# EAGLE board basis (EAGLE 6.4)
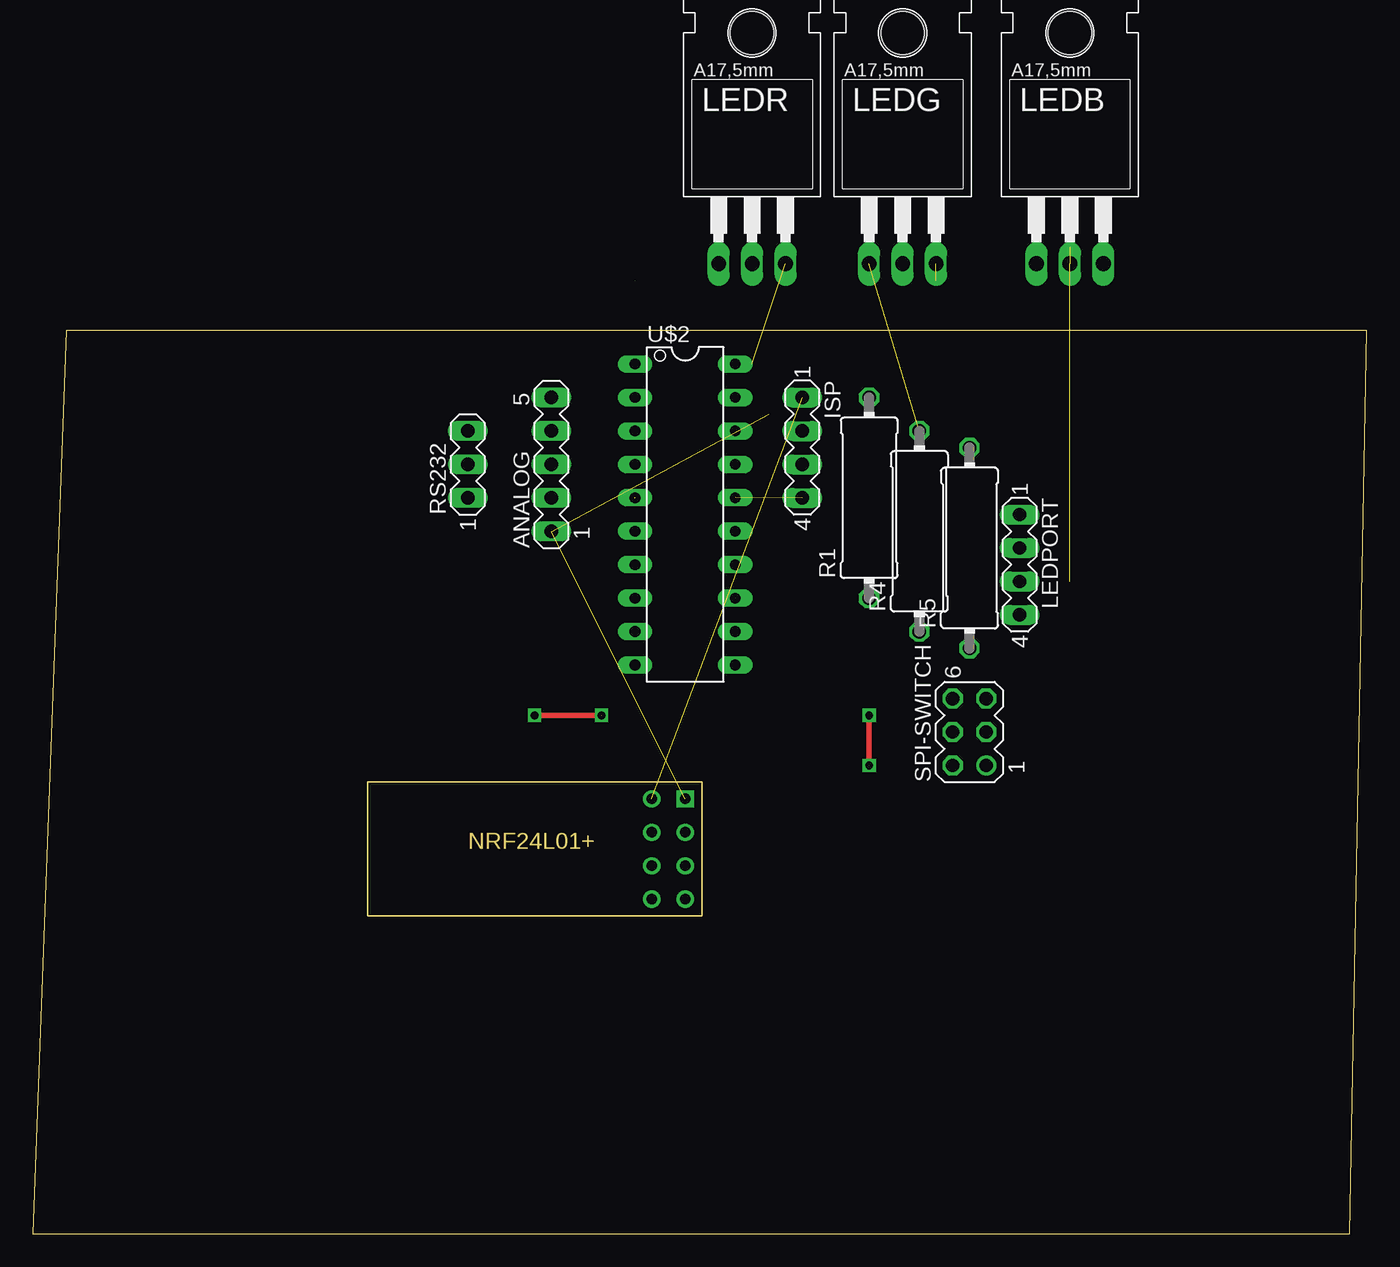
[diagram p0: board, top side]
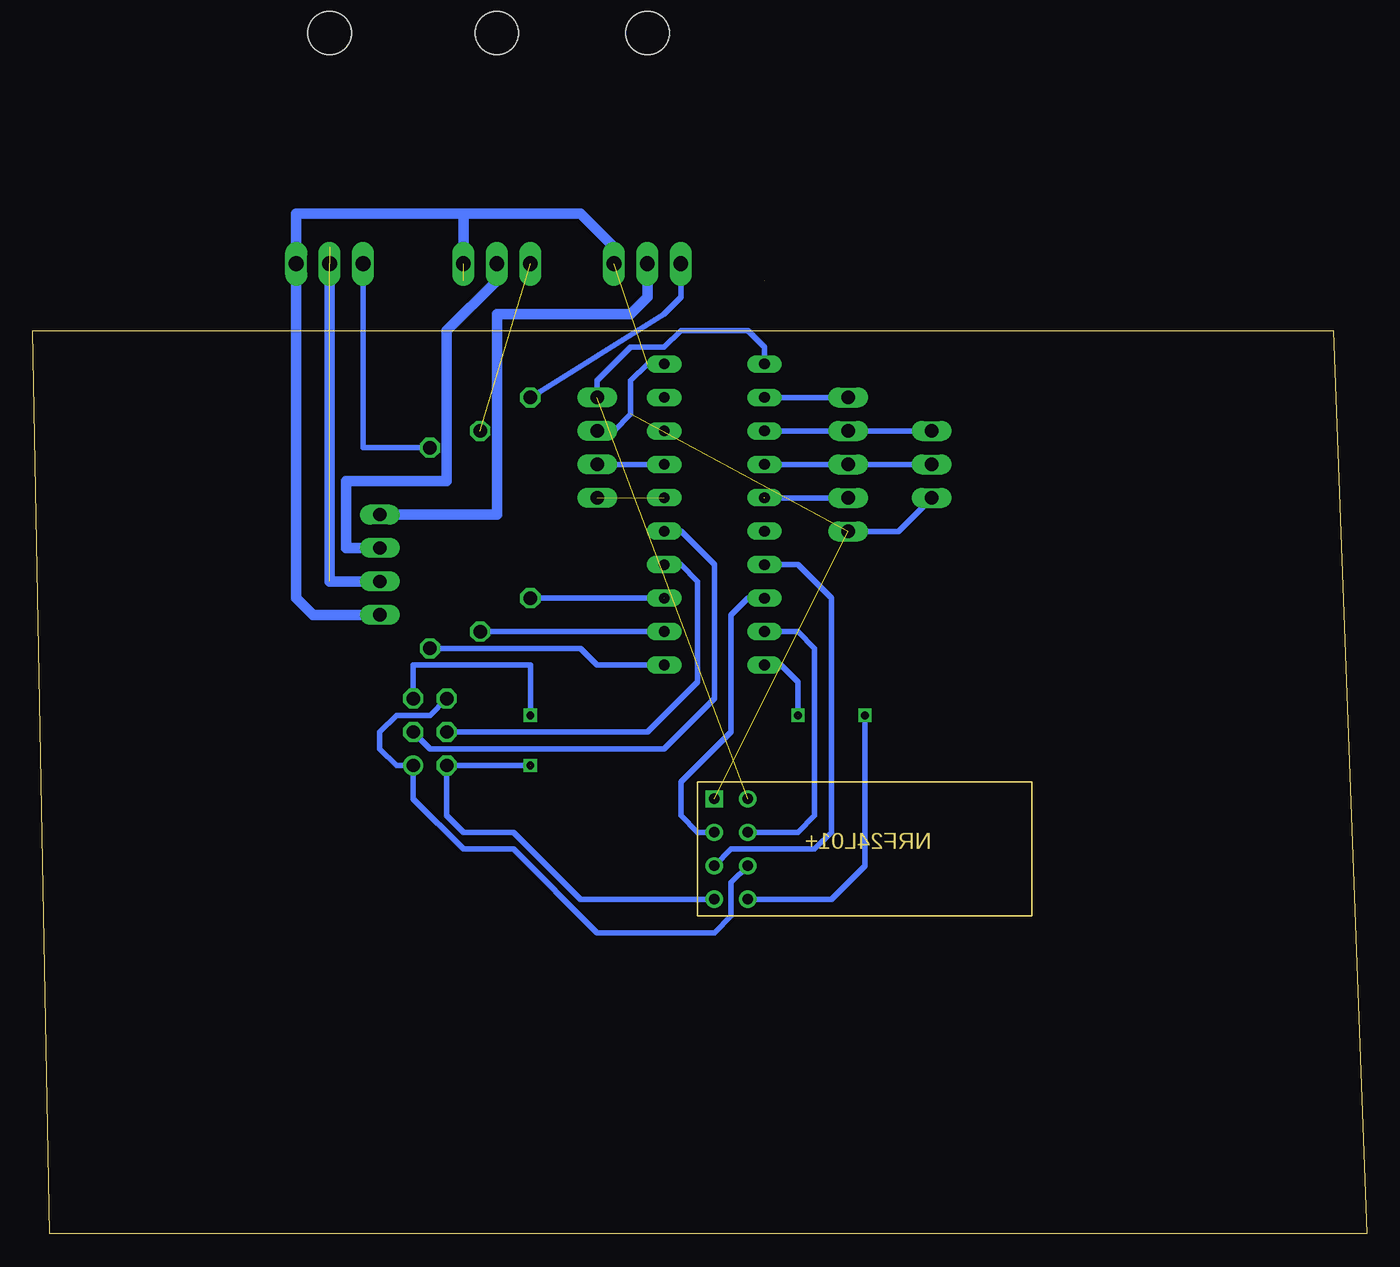
[diagram p1: board, bottom side, seen from below]

Size 101.27 x 68.57 mm. Coordinates in mm from the lower left corner, seen from the top.
Outline: 0,0 100,0 101.27,68.57 2.54,68.57 0,0
Copper layers (1*16): Top 0.035mm / dielectric 1.5mm / Bottom 0.035mm
Design rules "default": minimum track width 10mil, minimum drill 24mil, track to track 8mil, track to pad 8mil, pad to pad 8mil, via to via 8mil, smd to smd 8mil, copper to edge 40mil, drill to drill 8mil, minimum pad ring 10mil, minimum via ring 8mil, stop-mask expansion 4mil, vias tented up to drill 0mil, thermal gap 10mil

## Footprints (pad centres in the part's own frame; a part is rotated, then mirrored left to right if it is on the bottom)
MA05-1 = drill 1.016 long: 1 -5.08,0; 2 -2.54,0; 3 0,0; 4 2.54,0; 5 5.08,0
MA04-1 = drill 1.016 long: 1 -3.81,0; 2 -1.27,0; 3 1.27,0; 4 3.81,0
TO220 = drill 1.118 long: 1 -2.54,-6.35; 2 0,-6.35; 3 2.54,-6.35 | hole 3.302: 0,11.176
0414/15 = drill 1.016 octagon: 1 -7.62,0; 2 7.62,0
MA03-1 = drill 1.016 long: 1 -2.54,0; 2 0,0; 3 2.54,0
MA03-2 = drill 1.016: 1 -2.54,-1.27 | drill 1.016 octagon: 2 -2.54,1.27; 3 0,-1.27; 4 0,1.27; 5 2.54,-1.27; 6 2.54,1.27
MINI-PCB = drill 0.8: CE 12.7,0; CSN 10.16,0; IRQ 10.16,-5.08; MISO 12.7,-5.08; MOSI 10.16,-2.54; SCK 12.7,-2.54; VCC 10.16,2.54 | drill 0.8 square: GND 12.7,2.54
N20 = drill 0.813 long: 1 -11.435,-3.81; 2 -8.895,-3.81; 3 -6.355,-3.81; 4 -3.815,-3.81; 5 -1.275,-3.81; 6 1.265,-3.81; 7 3.805,-3.81; 8 6.345,-3.81; 9 8.885,-3.81; 10 11.425,-3.81; 11 11.425,3.81; 12 8.885,3.81; 13 6.345,3.81; 14 3.805,3.81; 15 1.265,3.81; 16 -1.275,3.81; 17 -3.815,3.81; 18 -6.355,3.81; 19 -8.895,3.81; 20 -11.435,3.81

## Placement (x,y rotation side)
ANALOG  5PIN  [MA05-1]  39.37,58.42 90 top
ISP  4PIN  [MA04-1]  58.42,59.69 270 top
LEDB  TIP122  [TO220]  78.74,80.01 0 top  (outside the outline)
LEDG  TIP122  [TO220]  66.04,80.01 0 top  (outside the outline)
LEDPORT  4pin  [MA04-1]  74.93,50.8 270 top
LEDR  TIP122  [TO220]  54.61,80.01 0 top  (outside the outline)
R1  1K  [0414/15]  63.5,55.88 90 top
R4  1K  [0414/15]  67.31,53.34 90 top
R5  1K  [0414/15]  71.12,52.07 90 top
RS232  SERIAL  [MA03-1]  33.02,58.42 90 top
SPI-SWITCH  SPI  [MA03-2]  71.12,38.1 90 top
U$1  NFR24L01+-PRINT  [MINI-PCB]  36.83,30.48 0 top
U$2  G2XX3---N20  [N20]  49.53,54.61 270 top

## Library data of the parts
ANALOG ISP LEDPORT RS232 SPI-SWITCH = con-lstb; OC_FARNELL: unknown; OC_NEWARK: unknown
LEDB LEDG LEDR = transistor-npn
R1 R4 R5 = rcl
U$1 = vincents-lib
U$2 = TI_MSP430_v16

## Nets
_REST: ISP.4 U$2.16
GND: ANALOG.1 ISP.2 LEDB.3 LEDG.3 LEDPORT.4 LEDR.3 RS232.1 U$1.GND U$2.20
N$1: U$1.SCK U$2.7
N$2: SPI-SWITCH.2 SPI-SWITCH.5 U$1.MISO
N$3: SPI-SWITCH.4 U$2.14
N$4: U$1.CE U$2.8
N$6: U$1.CSN U$2.9
N$7: U$1.IRQ U$2.10
N$9: SPI-SWITCH.3 U$2.15
N$11: SPI-SWITCH.1 SPI-SWITCH.6 U$1.MOSI
N$12: ANALOG.5 U$2.2
N$13: ANALOG.4 RS232.3 U$2.3
N$14: ANALOG.3 RS232.2 U$2.4
N$15: ANALOG.2 U$2.5
N$16: LEDR.1 R1.2
N$17: LEDG.1 R4.2
N$18: LEDB.1 R5.2
N$19: R1.1 U$2.13
N$20: R4.1 U$2.12
N$21: R5.1 U$2.11
N$22: LEDPORT.1 LEDR.2
N$23: LEDG.2 LEDPORT.2
N$24: LEDB.2 LEDPORT.3
TEST: ISP.3 U$2.17
VCC: ISP.1 U$1.VCC U$2.1

## Tracks (layer width: path | path; a pad name or v marks a point on that pad's centre or on a via)
_REST  (1 unrouted)
GND  (4 unrouted)
  Bottom 0.406: RS232.1 35.56,53.34 ANALOG.1 | U$2.20 54.6,66.05 55.88,64.77 55.88,62.23 57.15,60.96 ISP.2
  Bottom 0.813: 68.58,77.47 59.69,77.47 57.15,74.93 LEDR.3 | 68.58,72.39 68.58,77.47 | 68.58,77.47 81.28,77.47 LEDB.3 81.28,48.26 80.01,46.99 LEDPORT.4
N$1
  Bottom 0.406: U$1.SCK 48.26,29.21 41.91,29.21 40.64,30.48 40.64,48.26 43.18,50.8 U$2.7
N$2  (via drill 0.6)  (1 unrouted)
  Top 0.406: v63.5,39.37 63.5,35.56
  Bottom 0.406: U$1.MISO 59.69,25.4 64.77,30.48 68.58,30.48 69.85,31.75 SPI-SWITCH.2 63.5,35.56 | SPI-SWITCH.5 72.39,43.18 63.5,43.18 v63.5,39.37
N$3
  Bottom 0.406: U$2.14 52.08,50.8 50.8,49.53 50.8,41.91 54.61,38.1 SPI-SWITCH.4
N$4
  Bottom 0.406: U$2.8 46.98,48.27 48.26,46.99 48.26,38.1 52.07,34.29 52.07,31.75 50.8,30.48 U$1.CE
N$5  (via drill 0.6)
  other vias: 43.18,39.37
N$6
  Bottom 0.406: U$2.9 43.19,45.73 41.91,44.45 41.91,31.75 43.18,30.48 U$1.CSN
N$7  (via drill 0.6)  (1 unrouted)
  Top 0.406: v38.1,39.37 43.18,39.37
  Bottom 0.406: U$2.10 44.45,43.19 43.18,41.91 43.18,39.37 | U$1.IRQ 40.64,25.4 38.1,27.94 v38.1,39.37
N$8  (via drill 0.6)
  other vias: 38.1,39.37
N$9
  Bottom 0.406: U$2.15 52.08,53.34 49.53,50.8 49.53,40.64 53.34,36.83 71.12,36.83 SPI-SWITCH.3
N$10  (1 unrouted)
N$11
  Bottom 0.406: U$1.MOSI 48.26,26.67 48.26,24.13 49.53,22.86 58.42,22.86 64.77,29.21 68.58,29.21 72.39,33.02 SPI-SWITCH.1 73.66,35.56 74.93,36.83 74.93,38.1 73.66,39.37 71.12,39.37 SPI-SWITCH.6
N$12
  Bottom 0.406: U$2.2 ANALOG.5
N$13
  Bottom 0.406: RS232.3 ANALOG.4 U$2.3
N$14
  Bottom 0.406: RS232.2 ANALOG.3 U$2.4
N$15  (1 unrouted)
  Bottom 0.406: ANALOG.2 U$2.5
N$16
  Bottom 0.406: R1.2 53.34,69.85 52.07,71.12 LEDR.1
N$17  (1 unrouted)
N$18
  Bottom 0.406: R5.2 76.2,59.69 LEDB.1
N$19  (1 unrouted)
  Bottom 0.406: R1.1 U$2.13
N$20
  Bottom 0.406: R4.1 58.42,45.72 U$2.12
N$21
  Bottom 0.406: R5.1 59.69,44.45 58.42,43.19 U$2.11
N$22
  Bottom 0.813: LEDPORT.1 66.04,54.61 66.04,69.85 55.88,69.85 54.61,71.12 LEDR.2
N$23
  Bottom 0.813: LEDG.2 66.04,72.39 69.85,68.58 69.85,57.15 77.47,57.15 77.47,52.07 LEDPORT.2
N$24  (2 unrouted)
  Bottom 0.813: LEDPORT.3 78.74,49.53 78.74,74.93
N$25  (via drill 0.6)
  other vias: 63.5,39.37
N$26  (via drill 0.6)
  other vias: 63.5,35.56
TEST
  Bottom 0.406: U$2.17 ISP.3
VCC  (1 unrouted)
  Bottom 0.406: U$2.1 45.72,67.31 46.99,68.58 52.07,68.58 53.34,67.31 55.88,67.31 58.42,64.77 ISP.1